# EAGLE board proto_secondaire (EAGLE 6.1)
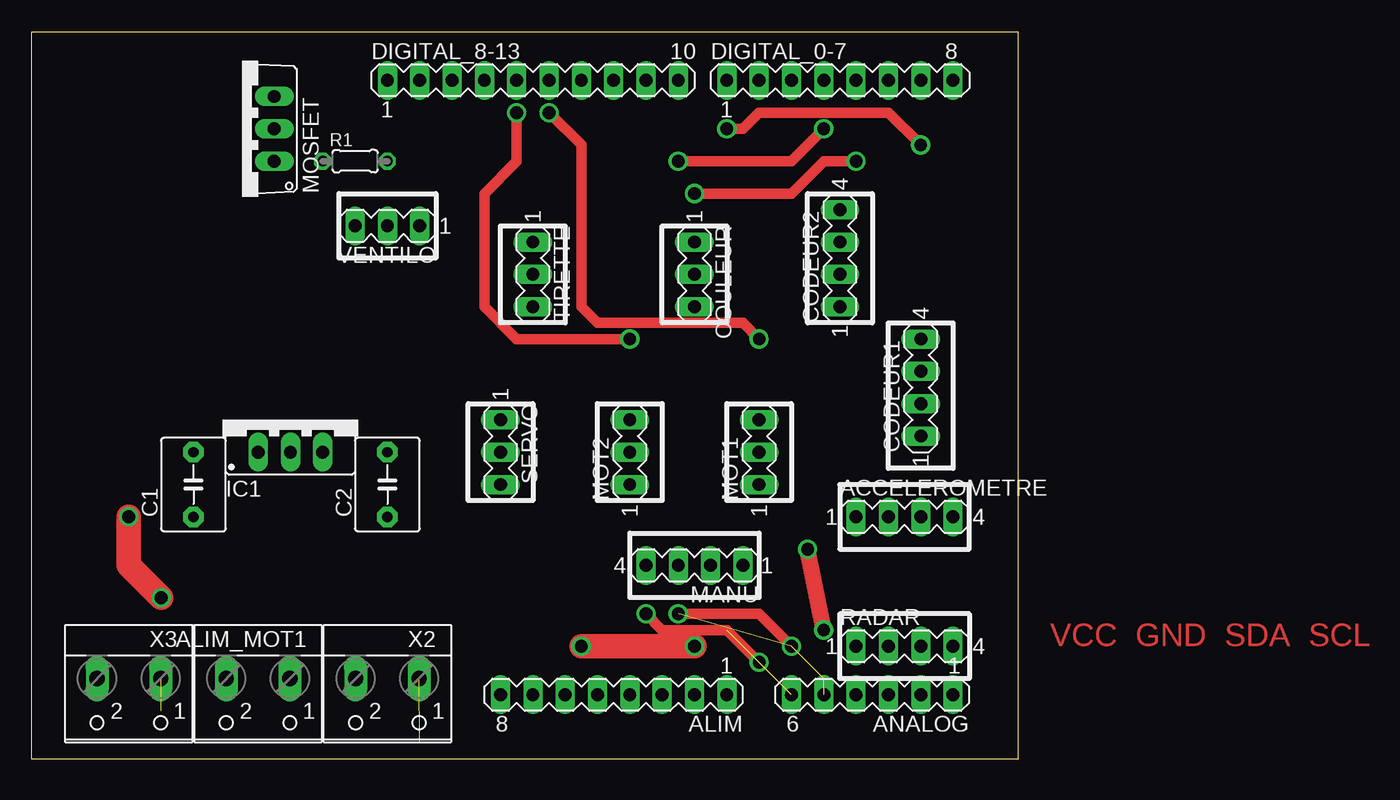
[diagram p0: board, top side]
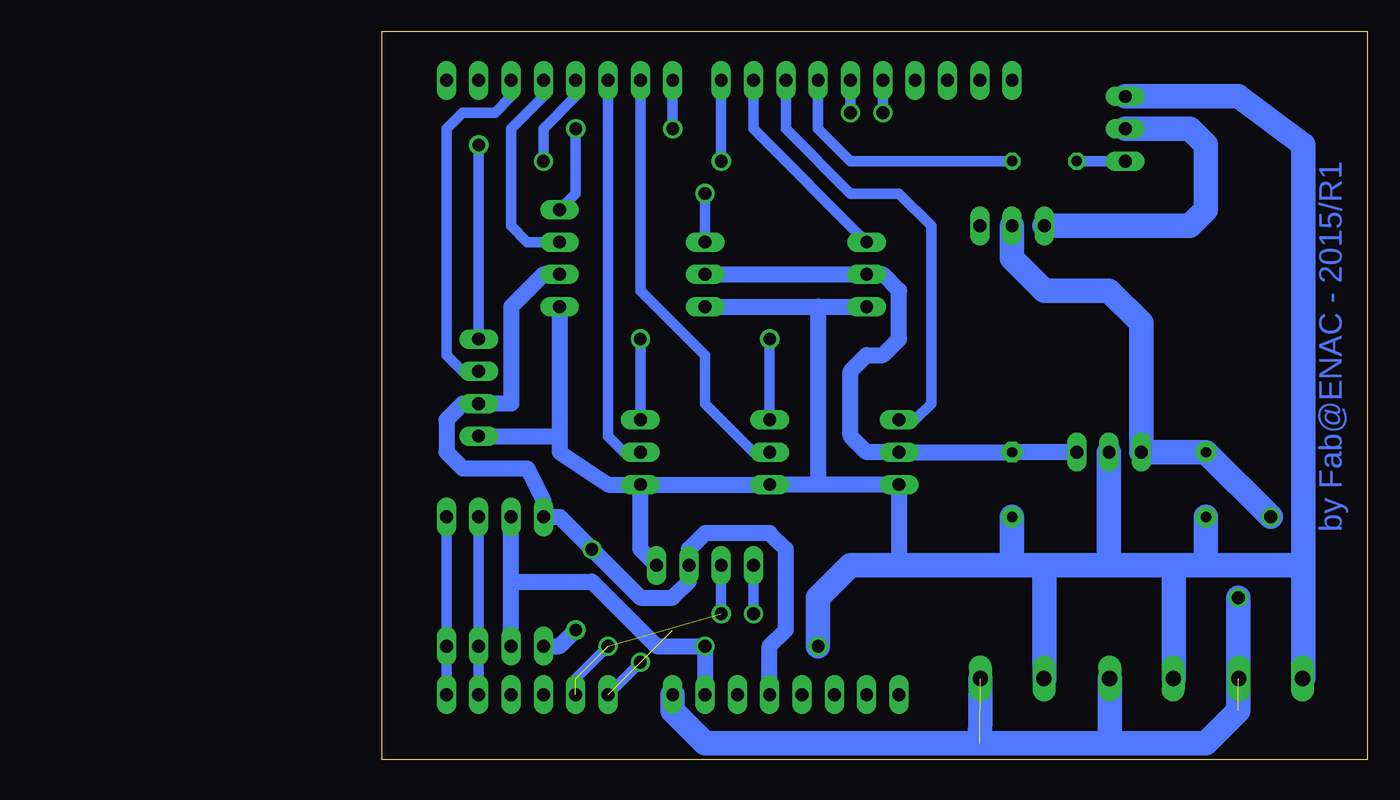
[diagram p1: board, bottom side, seen from below]

Size 77.47 x 57.15 mm. Coordinates in mm from the lower left corner, seen from the top.
Outline: 77.47,57.15 77.47,0 0,0 0,57.15 77.47,57.15
Copper layers (1*16): Top 0.035mm / dielectric 1.5mm / Bottom 0.035mm
Design rules: minimum track width 10mil, minimum drill 24mil, track to track 8mil, track to pad 8mil, pad to pad 8mil, via to via 8mil, smd to smd 8mil, copper to edge 40mil, drill to drill 8mil, minimum pad ring 10mil, minimum via ring 8mil, stop-mask expansion 4mil, vias tented up to drill 0mil, thermal gap 10mil

## Footprints (pad centres in the part's own frame; a part is rotated, then mirrored left to right if it is on the bottom)
MA04-1 = drill 1.016 long: 1 -3.81,0; 2 -1.27,0; 3 1.27,0; 4 3.81,0
MA08-1 = drill 1.016 long: 1 -8.89,0; 2 -6.35,0; 3 -3.81,0; 4 -1.27,0; 5 1.27,0; 6 3.81,0; 7 6.35,0; 8 8.89,0
W237-102 = drill 1.194 long: 1 -2.5,-1.27; 2 2.5,-1.27
MA06-1 = drill 1.016 long: 1 -6.35,0; 2 -3.81,0; 3 -1.27,0; 4 1.27,0; 5 3.81,0; 6 6.35,0
C5B5 = drill 0.813 pad 1.6 octagon: 1 -2.54,0; 2 2.54,0
MA03-1 = drill 1.016 long: 1 -2.54,0; 2 0,0; 3 2.54,0
MA10-1 = drill 1.016 long: 1 -11.43,0; 2 -8.89,0; 3 -6.35,0; 4 -3.81,0; 5 -1.27,0; 6 1.27,0; 7 3.81,0; 8 6.35,0; 9 8.89,0; 10 11.43,0
78XXS = drill 1.016 long: GND 0,-2.54; IN -2.54,-2.54; OUT 2.54,-2.54
TO220AV = drill 1.016 long: B -2.54,-2.54; C 0,-2.54; E 2.54,-2.54
0204/5 = drill 0.813 octagon: 1 -2.54,0; 2 2.54,0

## Placement (x,y rotation side)
ACCELEROMETRE  [MA04-1]  68.58,19.05 0 top
ALIM  [MA08-1]  45.72,5.08 180 top
ALIM_MOT1  [W237-102]  17.78,5.08 180 top
ANALOG  [MA06-1]  66.04,5.08 180 top
C1  33uF  [C5B5]  12.7,21.59 90 top
C2  100uF  [C5B5]  27.94,21.59 90 top
CODEUR1  [MA04-1]  69.85,29.21 90 top
CODEUR2  [MA04-1]  63.5,39.37 90 top
COULEUR  [MA03-1]  52.07,38.1 270 top
DIGITAL_0-7  [MA08-1]  63.5,53.34 0 top
DIGITAL_8-13  [MA10-1]  39.37,53.34 0 top
IC1  [78XXS]  20.32,26.67 0 top
MANU  [MA04-1]  52.07,15.24 180 top
MOSFET  MFR475V  [TO220AV]  16.51,49.53 90 top
MOT1  [MA03-1]  57.15,24.13 90 top
MOT2  [MA03-1]  46.99,24.13 90 top
R1  [0204/5]  25.4,46.99 0 top
RADAR  [MA04-1]  68.58,8.89 0 top
SERVO  [MA03-1]  36.83,24.13 270 top
TIRETTE  [MA03-1]  39.37,38.1 270 top
VENTILO  [MA03-1]  27.94,41.91 180 top
X2  [W237-102]  27.94,5.08 180 top
X3  [W237-102]  7.62,5.08 180 top

## Library data of the parts
ACCELEROMETRE ALIM ANALOG CODEUR1 CODEUR2 COULEUR DIGITAL_0-7 DIGITAL_8-13 MANU MOT1 MOT2 RADAR SERVO TIRETTE VENTILO = con-lstb; OC_FARNELL: unknown; OC_NEWARK: unknown
ALIM_MOT1 X2 X3 = con-wago-500; MPN: 237-102; OC_FARNELL: unknown; OC_NEWARK: 70K9898
C1 C2 = capacitor-wima
IC1 = v-reg
MOSFET = transistor-power
R1 = resistor

## Nets
CODEUR2_ETAT: CODEUR2.3 DIGITAL_0-7.5
N$1: CODEUR1.4 DIGITAL_0-7.1
N$2: ANALOG.5 MANU.3
N$4: CODEUR2.4 DIGITAL_8-13.10
N$5: CODEUR1.3 DIGITAL_0-7.6
N$6: DIGITAL_0-7.2 MOT2.2
N$7: DIGITAL_8-13.5 MOT2.3
N$8: DIGITAL_0-7.3 MOT1.2
N$9: DIGITAL_8-13.6 MOT1.3
N$11: MOSFET.B R1.1
N$12: DIGITAL_8-13.7 R1.2
N$13: ANALOG.6 MANU.4
N$14: ALIM.1 ALIM_MOT1.1 C1.2 IC1.IN VENTILO.2 X2.1 X3.1
N$15: MOSFET.C VENTILO.3
N$16: COULEUR.1 DIGITAL_0-7.4
N$17: DIGITAL_8-13.8 SERVO.1
N$18: DIGITAL_8-13.9 TIRETTE.1
N$19: C2.2 COULEUR.2 IC1.OUT SERVO.2 TIRETTE.2
N$20: ACCELEROMETRE.2 ALIM.2 ALIM_MOT1.2 C1.1 C2.1 CODEUR1.1 CODEUR2.1 COULEUR.3 IC1.GND MANU.1 MOSFET.E MOT1.1 MOT2.1 RADAR.2 SERVO.3 TIRETTE.3 X2.2 X3.2
N$21: ACCELEROMETRE.4 ANALOG.1 RADAR.4
N$22: ACCELEROMETRE.3 ANALOG.2 RADAR.3
N$27: ACCELEROMETRE.1 ALIM.4 CODEUR1.2 CODEUR2.2 MANU.2 RADAR.1

## Tracks (layer width: path | path; a pad name or v marks a point on that pad's centre or on a via)
CODEUR2_ETAT
  Bottom 0.813: DIGITAL_0-7.5 64.77,52.07 67.31,49.53 67.31,41.91 66.04,40.64 CODEUR2.3
N$1  (via drill 1)
  Top 0.813: v69.85,48.26 67.31,50.8 57.15,50.8 55.88,49.53 v54.61,49.53
  Bottom 0.813: DIGITAL_0-7.1 v54.61,49.53 | CODEUR1.4 v69.85,48.26
N$2  (via drill 1)  (4 unrouted)
  Top 0.813: v50.8,11.43 57.15,11.43 v59.69,8.89
  Bottom 0.813: MANU.3 v50.8,11.43 | ANALOG.5 62.23,6.35 v59.69,8.89
N$4  (via drill 1)
  Top 0.813: v50.8,46.99 59.69,46.99 v62.23,49.53
  Bottom 0.813: DIGITAL_8-13.10 v50.8,46.99 | v62.23,49.53 62.23,44.45 CODEUR2.4
N$5
  Bottom 0.813: CODEUR1.3 71.12,30.48 72.39,31.75 72.39,49.53 71.12,50.8 68.58,50.8 67.31,52.07 DIGITAL_0-7.6
N$6
  Bottom 0.813: DIGITAL_0-7.2 57.15,36.83 52.07,31.75 52.07,27.94 48.26,24.13 MOT2.2
N$7  (via drill 1)
  Top 0.813: v46.99,33.02 38.1,33.02 35.56,35.56 35.56,44.45 38.1,46.99 v38.1,50.8
  Bottom 0.813: MOT2.3 v46.99,33.02 | v38.1,50.8 DIGITAL_8-13.5
N$8
  Bottom 0.813: MOT1.2 58.42,24.13 59.69,25.4 DIGITAL_0-7.3
N$9  (via drill 1)
  Top 0.813: v57.15,33.02 55.88,34.29 44.45,34.29 43.18,35.56 43.18,48.26 v40.64,50.8
  Bottom 0.813: MOT1.3 v57.15,33.02 | v40.64,50.8 DIGITAL_8-13.6
N$11
  Bottom 0.813: R1.1 MOSFET.B
N$12
  Bottom 0.813: R1.2 40.64,46.99 43.18,49.53 DIGITAL_8-13.7
N$13  (via drill 1)  (2 unrouted)
  Top 0.813: v57.15,7.62 54.61,10.16 49.53,10.16 v48.26,11.43
  Bottom 0.813: MANU.4 v48.26,11.43 | ANALOG.6 v57.15,7.62
N$14  (via drill 1)  (3 unrouted)
  Top 1.93: v10.16,12.7 7.62,15.24 v7.62,19.05
  Bottom 1.93: VENTILO.2 27.94,39.37 25.4,36.83 20.32,36.83 17.78,34.29 IC1.IN C1.2 v7.62,19.05 | X2.1 30.44,3.77 30.48,1.27 | 30.48,1.27 20.32,1.27 | 20.32,1.27 12.7,1.27 10.16,3.81 v10.16,12.7 | ALIM_MOT1.1 20.28,2.58 20.32,1.27 | ALIM.1 54.61,3.81 52.07,1.27 30.48,1.27
N$15
  Bottom 1.93: VENTILO.3 13.97,41.91 12.7,43.18 12.7,48.26 13.97,49.53 MOSFET.C
N$16  (via drill 1)
  Top 0.813: v64.77,46.99 62.23,46.99 59.69,44.45 v52.07,44.45
  Bottom 0.813: COULEUR.1 v52.07,44.45 | DIGITAL_0-7.4 62.23,52.07 64.77,49.53 v64.77,46.99
N$17
  Bottom 0.813: DIGITAL_8-13.8 45.72,49.53 40.64,44.45 36.83,44.45 34.29,41.91 34.29,27.94 35.56,26.67 SERVO.1
N$18
  Bottom 0.813: DIGITAL_8-13.9 48.26,49.53 TIRETTE.1
N$19
  Bottom 1.27: COULEUR.2 TIRETTE.2 38.1,38.1 36.83,36.83 36.83,33.02 38.1,31.75 39.37,31.75 40.64,30.48 40.64,25.4 39.37,24.13 SERVO.2 C2.2 IC1.OUT
N$20  (via drill 1)
  Top 1.93: v43.18,8.89 v52.07,8.89
  Bottom 0.406: X2.2 25.4,6.35 | X3.2 5.08,6.35 | ALIM_MOT1.2 15.24,6.35
  Bottom 1.27: ALIM.2 v52.07,8.89 55.88,8.89 60.96,13.97 67.31,13.97 | COULEUR.3 43.18,35.56 | 43.18,35.56 TIRETTE.3 | MOT1.1 MOT2.1 43.18,21.59 | 43.18,21.59 SERVO.3 36.83,15.24 | 43.18,35.56 43.18,21.59 | CODEUR1.1 63.5,25.4 | 63.5,25.4 63.5,24.13 59.69,21.59 MOT1.1 | CODEUR2.1 63.5,25.4 | MANU.1 57.15,16.51 MOT1.1 | RADAR.2 67.31,13.97 | 67.31,13.97 ACCELEROMETRE.2
  Bottom 1.905: 36.83,15.24 40.64,15.24 43.18,12.7 v43.18,8.89 | 5.08,6.35 5.08,15.24 5.08,48.26
  Bottom 1.93: 27.94,15.24 36.83,15.24 | 15.24,6.35 15.24,15.24 | 15.24,15.24 12.7,15.24 | 12.7,15.24 5.08,15.24 | 25.4,6.35 25.4,15.24 | 25.4,15.24 27.94,15.24 | 15.24,15.24 20.32,15.24 | 20.32,15.24 25.4,15.24 | 5.08,48.26 10.16,52.07 MOSFET.E | IC1.GND 20.32,15.24 | C1.1 12.7,15.24 | C2.1 27.94,15.24
N$21
  Bottom 0.813: ACCELEROMETRE.4 RADAR.4 ANALOG.1
N$22
  Bottom 0.813: ACCELEROMETRE.3 RADAR.3 ANALOG.2
N$27  (via drill 1)
  Top 1.27: v62.23,10.16 v60.96,16.51
  Bottom 1.27: ALIM.4 46.99,8.89 45.72,10.16 45.72,16.51 46.99,17.78 52.07,17.78 53.34,16.51 MANU.2 53.34,13.97 54.61,12.7 57.15,12.7 v60.96,16.51 63.5,19.05 ACCELEROMETRE.1 64.77,20.32 66.04,22.86 71.12,22.86 72.39,24.13 72.39,26.67 71.12,27.94 CODEUR1.2 67.31,27.94 67.31,35.56 64.77,38.1 CODEUR2.2 | RADAR.1 63.5,8.89 v62.23,10.16

## Text on the board
Top: VCC GND SDA SCL
Bottom: by Fab@ENAC - 2015/R1